# Altium PCB УШЯИ.467444.130_R1.PcbDoc (part 2 of 4)
Units mm, origin at the board's own origin, x right, y up, seen from the top; angles counter-clockwise.
Board outline 280 x 190 mm, 6 copper layers (Top, GND, INT1, INT2, +3.3VB, POWER, Bottom), stack 1.422 mm thick; 240 components, 189 nets, 1128 pads, 331 vias.
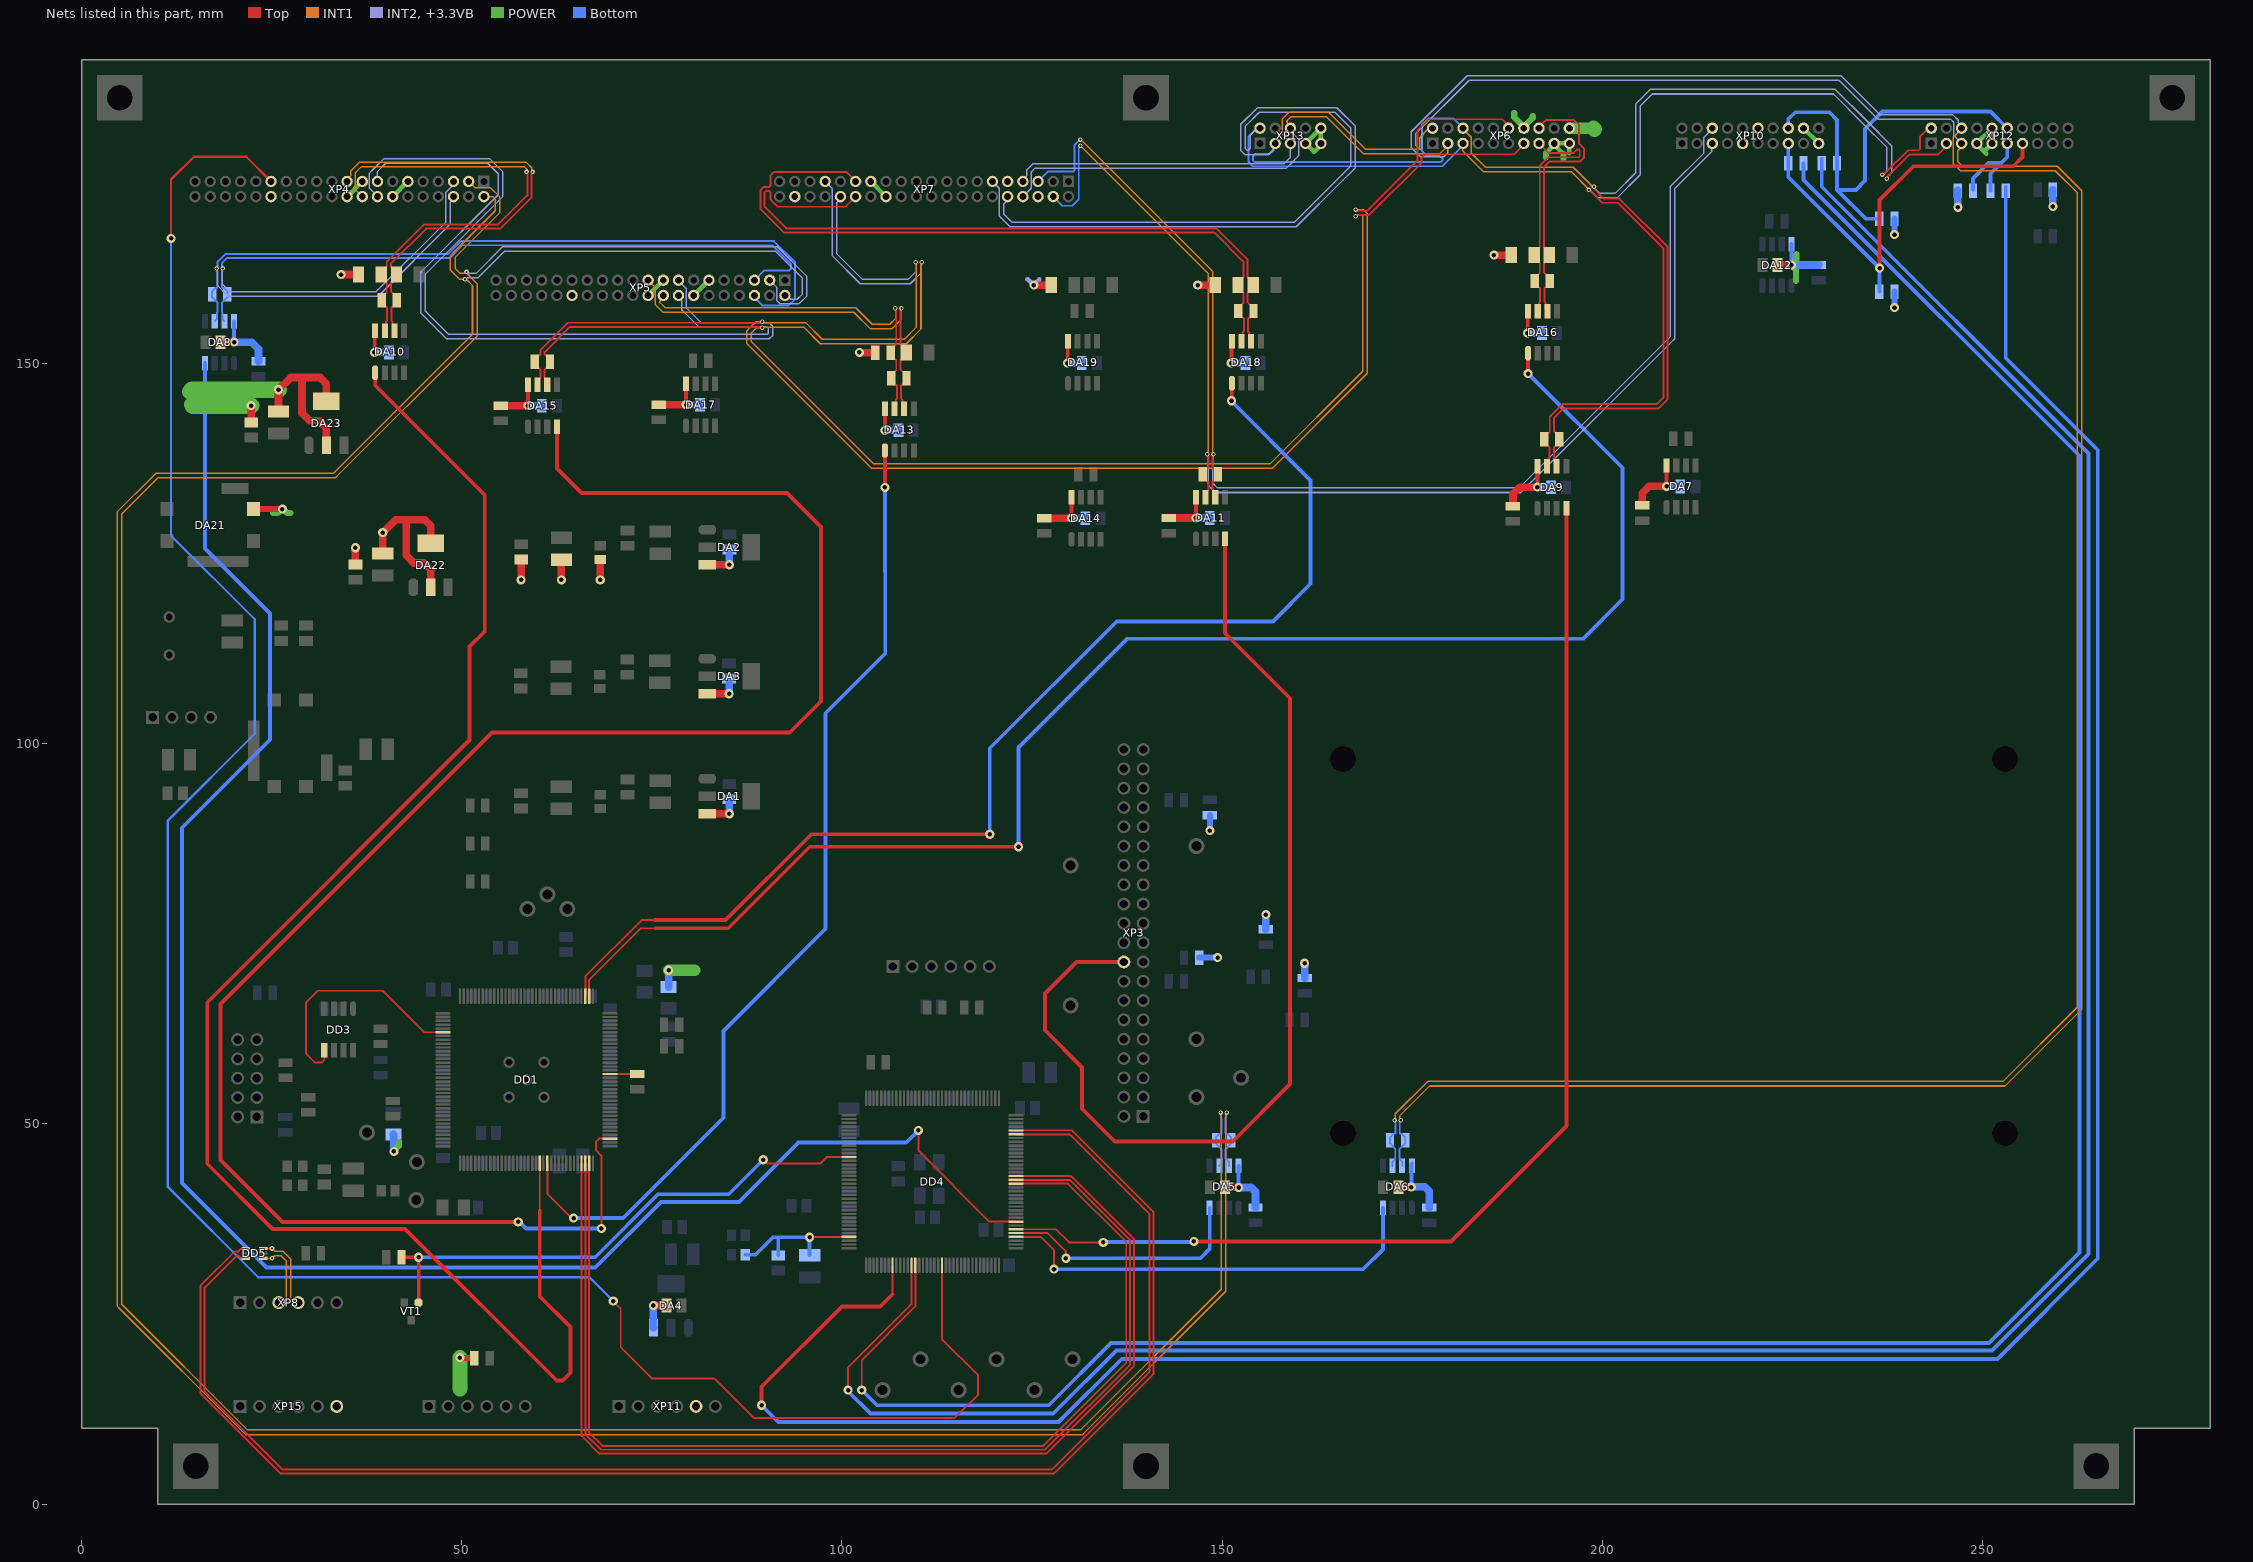
[diagram p6: the nets of this part, all layers, seen from the top]

## Part data
A1: library part Other_15, "8GB Rockchip RK3588, HDMI 2.1, Gigabit LAN port, USB2.0/3.0, microSD card slot, USB Type-C", Manufacturer="Orange Pi", Component Name="Одноплатный компьютер Orange Pi 5 Plus 8GB", Device="Orange Pi 5 Plus", Height=29mm, ID=Other_15, Other information="Идет с покупным устройством: твердотельный накопитель Kingspec SSD NE-128 2280", Weight, kg=0,115, Крепёж="Винт В2.М3-6gx8.36.016 ГОСТ 17473-80 (4шт.), гайка М3-7Н.04.016 ГОСТ 5927-70 (4шт.), Шайба 3.65Г.016 ГОСТ 6402-70 (8шт.),  Шайба 3.04.013 ГОСТ 11371-78 (8шт.), Стойка PCHSN-10 (Ni) Connfly electronic (ChipDip 9000221060)(4шт.)"
C1 C3 C6 C7 C8 C9 C10 C12 C14 C15 C17 C18 C19 C20 C21 C22 C23 C24 C25 C27 C29 C31 C32 C33 C34 C35 C36 C37 C38 C39 C41 C42 C43 C44 C45 C46 C47 C48 C49 C50 C51 C52 C53 C54 C55 C56 C57 C58 C63 C65 C68 C69 C70 C71 C72 C73 C74 C75 C76 C77 C78 C79 C80 C81 C82 C84 C87 C90 C94: library part Cap_60, "Неполярный конденсатор", Case / Package="0805 [2012 Metric]", Manufacturer=Murata, Tolerance=±10%, Voltage=50V, Capacitance="0,1 µF", Component Name="Конденсатор GRM21BR71H104KA01L", Datasheet=https://www.murata.com/en-eu/products/productdetail?partno=GRM21BR71H104KA01%23, Height=1.4mm, ID=Cap_60, Weight, kg=0,000006
  C27 C29: ClassName=Class_VCINT
  C39: ClassName=Class_VCCIO
  C69: ClassName=DA8
  C70: ClassName=DA9
  C71: ClassName=DA7
  C72: ClassName=DA10
  C73: ClassName=DA11
  C74: ClassName=DA12
  C75: ClassName=DA13
  C76: ClassName=DA14
  C77: ClassName=DA15
  C78: ClassName=DA16
  C79: ClassName=DA17
  C80: ClassName=DA18
  C81: ClassName=DA19
C2 C11 C26 C28 C30 C59: library part Cap_14, "Полярный конденсатор", Case / Package="1210 [3528-21 Metric]", Manufacturer="KYOCERA AVX", Tolerance=±10%, Voltage="20V / 10V", Capacitance="4,7 µF", Component Name="Конденсатор TAJB475K020", Datasheet=https://datasheets.kyocera-avx.com/TAJ.pdf, Height=2mm, ID=Cap_14, Weight, kg=0,000016
  C11: ClassName=Class_+2.5V
  C26: ClassName=Class_VCCIO
  C28 C30: ClassName=Class_VCINT
C4 C5: library part Cap_96, "Неполярный конденсатор", Case / Package="0805 [2012 Metric]", Manufacturer=Murata, Tolerance=±10%, Voltage=16V, Capacitance="1 µF", Catalogue="CHIPDIP 8046406206", Component Name="Конденсатор GRM21BR71H105KA01L", Datasheet=https://static.chipdip.ru/lib/223/DOC011223313.pdf, Height=1.4mm, ID=Cap_96, Weight, kg=0,000006
C16 C40 C62 C64 C88 C89 C91 C95: library part Cap_56, "Полярный конденсатор", Case / Package="1210 [3528-21 Metric]", Manufacturer="KYOCERA AVX", Tolerance=±20%, Voltage="20V / 10V", Capacitance="10 µF", Component Name="Конденсатор TAJB106M020", Datasheet=https://datasheets.kyocera-avx.com/TAJ.pdf, Height=2mm, ID=Cap_56, Weight, kg=0,000016
  C16: ClassName=Class_+2.5V
  C40: ClassName=Class_VCCIO
C60 C61: library part Cap_69, "Неполярный конденсатор", Case / Package="0805 [2012 Metric]", Manufacturer=Murata, Tolerance=±5%, Voltage=50V, Capacitance="20 pF", Component Name="Конденсатор GRM2165C1H200J", Datasheet=chrome-extension://efaidnbmnnnibpcajpcglclefindmkaj/https://static.chipdip.ru/lib/235/DOC000235066.pdf, Height=1.4mm, ID=Cap_69, Weight, kg=0,000006
C66 C67: library part Cap_16, "Полярный конденсатор", Case / Package="1206 [3216-18 Metric]", Manufacturer=AVX, Tolerance=±20%, Voltage="16V / 10V", Capacitance="2,2 µF", Component Name="Конденсатор TAJA225M016", Datasheet=https://datasheets.kyocera-avx.com/TAJ.pdf, Height=1.7mm, ID=Cap_16, Weight, kg=0,000016
C86: library part Cap_70, "Полярный конденсатор", Manufacturer=Hitano, Tolerance="± 20%", Voltage=16V, Capacitance="1000 µF", Component Name="Конденсатор EXR102M16B", Datasheet=chrome-extension://efaidnbmnnnibpcajpcglclefindmkaj/https://static.chipdip.ru/lib/934/DOC044934708.pdf, Height=21mm, ID=Cap_70, Weight, kg=0,003
C92 C97: library part Cap_60, "Неполярный конденсатор", Capacitance="0,1 µF", Case / Package="0805 [2012 Metric]", Manufacturer=Murata, Tolerance=±10%, Voltage=50V, Component Name="Конденсатор GRM21BR71H104KA01L", Datasheet=https://www.murata.com/en-eu/products/productdetail?partno=GRM21BR71H104KA01%23, Height=1.4mm, ID=Cap_60, Weight, kg=0,000006
C93 C96: library part Cap_56, "Полярный конденсатор", Capacitance="10 µF", Case / Package="1210 [3528-21 Metric]", Manufacturer="KYOCERA AVX", Tolerance=±20%, Voltage="20V / 10V", Component Name="Конденсатор TAJB106M020", Datasheet=https://datasheets.kyocera-avx.com/TAJ.pdf, Height=2mm, ID=Cap_56, Weight, kg=0,000016
DA1 DA4 DA22 DA23: library part IC_1, "IC, Fixed LDO Voltage Regulator, 5.3V to 10V, 1.15V Dropout, 3.3Vout, 1Aout", Case / Package=SOT-223, Manufacturer=STMicroelectronics, Catalogue="DIGI-KEY 497-1228-2-ND", Component Name="Микросхема LD1117AS33TR", Datasheet=https://www.st.com/content/ccc/resource/technical/document/datasheet/a5/c3/3f/c9/2b/15/40/49/CD00002116.pdf/files/CD00002116.pdf/jcr:content/translations/en.CD00002116.pdf, Device=LD1117AS33TR, Height=1.9mm, ID=IC_1, Weight, kg=0,0045
  DA1: ClassName=Class_VCCIO
DA2: library part IC_8, "IC, Linear Voltage Regulator, 1 Output, 1V Dropout, 2.5Vout, 1Aout", Case / Package=SOT-223, Manufacturer=STMicroelectronics, Catalogue="DIGI-KEY 497-1227-1-ND", ClassName=Class_+2.5V, Component Name="Микросхема LD1117AS25TR", Datasheet=https://www.st.com/content/ccc/resource/technical/document/datasheet/a5/c3/3f/c9/2b/15/40/49/CD00002116.pdf/files/CD00002116.pdf/jcr:content/translations/en.CD00002116.pdf, Device=LD1117AS25TR, Height=1.9mm, ID=IC_8, Weight, kg=0,0045
DA3: library part IC_9, "IC, Fixed LDO Voltage Regulator, 1 Output, 1V Dropout, 1.2Vout, 1Aout", Case / Package=SOT-223, Manufacturer=STMicroelectronics, Catalogue="DIGI-KEY 497-6445-1-ND", ClassName=Class_VCINT, Component Name="Микросхема LD1117AS12TR", Datasheet=https://www.st.com/content/ccc/resource/technical/document/datasheet/a5/c3/3f/c9/2b/15/40/49/CD00002116.pdf/files/CD00002116.pdf/jcr:content/translations/en.CD00002116.pdf, Device=LD1117AS12TR, Height=1.9mm, ID=IC_9, Weight, kg=0,0045
DA5 DA6 DA7 DA8 DA9 DA11 DA12 DA14 DA17: library part IC_11, "IC, Transceiver, RS422/RS485, 1 Driver, 1 Receiver, 4.75 V to 5.25 V, -40°C to 125°C", Case / Package=SOIC-8, Manufacturer="Analog Devices", Component Name="Микросхема ADM483AR", Datasheet=https://www.analog.com/media/en/technical-documentation/data-sheets/ADM383.pdf, Device=ADM483AR, Height=1.75mm, ID=IC_11, Weight, kg=0,0002
  DA7: ClassName=DA7
  DA8: ClassName=DA8
  DA9: ClassName=DA9
  DA11: ClassName=DA11
  DA12: ClassName=DA12
  DA14: ClassName=DA14
  DA17: ClassName=DA17
DA10 DA13 DA15 DA16 DA18 DA19: library part IC_57, "IC, RS422 / RS485 Transceiver IC, 1 Driver, 1 Receiver, 3 V to 3.6 V, -40°C to 125°C, SOIC-8", Case / Package=SOIC-8, Manufacturer="Texas Instruments", Catalogue="ChipDip 8002953832", Component Name="Микросхема SN65HVD75D", Datasheet=https://static.chipdip.ru/lib/276/DOC012276983.pdf, Device=SN65HVD75D, Height=1.75mm, ID=IC_57, Weight, kg=0,002
  DA10: ClassName=DA10
  DA13: ClassName=DA13
  DA15: ClassName=DA15
  DA16: ClassName=DA16
  DA18: ClassName=DA18
  DA19: ClassName=DA19
DA20 DA21: library part Filt_2, "16В, 35дБ", Current=20А, Manufacturer="Murata Electronics", Component Name="Фильтр BNX028-01", Datasheet=https://static.chipdip.ru/lib/614/DOC034614186.pdf, Device=BNX028-01, Height=3.7mm, ID=Filt_2, Weight, kg=0,001
DD1: library part IC_13, "IC, Cyclone III, Field Programmable Gate Array (FPGA), 	1.15V to 1.25V, 315 MHz, 94 I/O", Case / Package="144-EQFP (20x20)", Manufacturer=Intel, Catalogue="DIGI-KEY EP3C5E144I7-ND", Component Name="Микросхема EP3C5E144I7", Datasheet=https://www.intel.com/content/dam/support/us/en/programmable/support-resources/bulk-container/pdfs/literature/hb/cfg/cyc-c51014.pdf, Device=EP3C5E144I7, Height=1.6mm, ID=IC_13, Weight, kg=0,012
DD2: library part Other_16, "Crystals, Oscillators, 20 MHz", Manufacturer="Jauch Quartz GmbH", Component Name="Кварцевый генератор O 20,0-JO32-B-3.3-1-T1-LF", Datasheet=https://static.chipdip.ru/lib/464/DOC049464856.pdf, Device="O 20,0-JO32-B-3.3-1-T1-LF", Height=1.15mm, ID=Other_16, Weight, kg=0,001
DD3: library part IC_12, "IC, FPGA Configuration Memory, Flash, 4 Mbit, 40 MHz, JTAG, Serial", Case / Package=SOIC-8, Manufacturer=Intel, Catalogue="FARNELL 1662262", Component Name="Микросхема EPCS4SI8N", Datasheet=https://www.intel.com/content/dam/support/us/en/programmable/support-resources/bulk-container/pdfs/literature/hb/cfg/cyc-c51014.pdf, Device=EPCS4SI8N, Height=1.75mm, ID=IC_12, Weight, kg=0,0002
DD4: library part IC_15, "IC, ARM Cortex-M4, 168 MHz, 1 MB ROM, 192 kB RAM, -40°C to 85°C", Case / Package="144-QFP (20x20)", Manufacturer=STMicroelectronics, Component Name="Микросхема STM32F407ZGTx", Datasheet=https://www.st.com/resource/en/datasheet/dm00037051.pdf, Device=STM32F429VIT6STM32F407ZGTx, Height=1.6mm, ID=IC_15, Weight, kg=0,0011
DD5: library part IC_5, "EMI Filter, 2-Channel, USB Upstream Terminator, ESD Protection", Case / Package=SOT-323-6, Manufacturer=STMicroelectronics, Catalogue="FARNELL 2341662", Component Name="Микросхема USBUF01W6", Datasheet=https://www.farnell.com/datasheets/1964274.pdf, Device=USBUF01W6, Height=1.1mm, ID=IC_5, Weight, kg=0,000006
L1 L3 L4 L5: library part Ind_4, Manufacturer=Murata, Resistance="0.1 ohm", Tolerance=±20%, Component Name="Дроссель LQH31CNR22M03", Datasheet=https://www.murata.com/products/productdetail?partno=LQH31CNR22M03%23, Height=2mm, ID=Ind_4, Inductance="0,22 μH", Isat=850mA, Weight, kg=0,00003
L2 L6 L7 L8 L9 L10: library part Ind_5, Case / Package="0805 [2012 Metric]", Manufacturer=Vishay, Resistance="300 mOhm", Tolerance=±25%, Catalogue="DIGI-KEY 541-2297-1-ND", Component Name="Фильтр ферритовый ILBB0805ER601V", Datasheet=https://www.vishay.com/docs/34025/ilbb0805.pdf, Height=1.1mm, ID=Ind_5, Isat=200mA, Weight, kg=0,00006
  L2: ClassName=Class_VCCIO
  L6: ClassName=Class_+2.5V
  L7: ClassName=Class_VCINT
R2: library part Res_12, Case / Package="0805 [2012 Metric]", Tolerance=±5%, Component Name="Резистор 0805-51 Ом ±5%", Height=0.7mm, ID=Res_12, Resistance=51R, Weight, kg=0,000006
R3 R5 R7 R53 R54 R64 R65 R66 R67 R68 R69 R70 R71 R72 R73: library part Res_11, Case / Package="0805 [2012 Metric]", Tolerance=±5%, Component Name="Резистор 0805-1 кОм ±5%", Height=0.7mm, ID=Res_11, Resistance=1k, Weight, kg=0,000006
R4 R6 R8 R9 R10 R11 R12 R13 R14 R15 R17 R19 R20 R21 R28 R29 R35 R36 R42 R61: library part Res_5, Case / Package="0805 [2012 Metric]", Tolerance=±5%, Component Name="Резистор 0805-10 кОм ±5%", Height=0.7mm, ID=Res_5, Resistance=10k, Weight, kg=0,000006
  R19: ClassName=DA7
  R20: ClassName=DA8
  R21: ClassName=DA9
  R28: ClassName=DA11
  R29: ClassName=DA12
  R35: ClassName=DA14
  R36: ClassName=DA15
  R42: ClassName=DA17
R16 R18 R22 R23 R24 R26 R30 R31 R32 R33 R38 R39 R40 R44 R45 R47: library part Res_10, Case / Package="0805 [2012 Metric]", Tolerance=±5%, Component Name="Резистор 0805-100 Ом ±5%", Height=0.7mm, ID=Res_10, Resistance=100R, Weight, kg=0,000006
  R22: ClassName=DA8
  R23: ClassName=DA9
  R24: ClassName=DA7
  R26: ClassName=DA10
  R30 R31: ClassName=DA13
  R32: ClassName=DA11
  R33: ClassName=DA12
  R38: ClassName=DA16
  R39: ClassName=DA14
  R40: ClassName=DA15
  R44: ClassName=DA18
  R45: ClassName=DA17
  R47: ClassName=DA19
R25 R27 R34 R37 R41 R43 R46 R48 R49: library part Res_50, Case / Package="1206 [3216 Metric]", Tolerance=±5%, Component Name="Резистор 1206-1 кОм ±5%", Height=0.7mm, ID=Res_50, Resistance=1k, Weight, kg=0,0000162
  R25 R27: ClassName=DA10
  R34: ClassName=DA13
  R37 R41: ClassName=DA16
  R43 R48: ClassName=DA18
  R46 R49: ClassName=DA19
R50: library part Res_89, Case / Package="0805 [2012 Metric]", Tolerance=±5%, Component Name="Резистор 0805-30 Ом ±5%", Height=0.7mm, ID=Res_89, Resistance=30R, Weight, kg=0,000006
R51 R52 R55 R56: library part Res_163, Case / Package="0805 [2012 Metric]", Tolerance=±5%, Component Name="Резистор 0805-5,1 кОм ±5%", Height=0.7mm, ID=Res_163, Resistance=5,1k, Weight, kg=0,000006
R57: library part Res_57, Case / Package="0805 [2012 Metric]", Tolerance=±1%, Component Name="Резистор 0805-10 кОм ±1%", Height=0.7mm, ID=Res_57, Resistance=10k, Weight, kg=0,000006
R58 R59: library part Res_11, Case / Package="0805 [2012 Metric]", Resistance=1k, Tolerance=±5%, Component Name="Резистор 0805-1 кОм ±5%", Height=0.7mm, ID=Res_11, Weight, kg=0,000006
R60: library part Res_165, Case / Package="0805 [2012 Metric]", Tolerance=±5%, Component Name="Резистор 0805-150 Ом ±5%", Height=0.7mm, ID=Res_165, Resistance=150R, Weight, kg=0,000006
R62 R63: library part Res_164, Case / Package="0805 [2012 Metric]", Tolerance=±5%, Component Name="Резистор 0805-3,6 кОм ±5%", Height=0.7mm, ID=Res_164, Resistance=3,6k, Weight, kg=0,000006
TP1 TP2 TP3 TP4 TP5 TP6 TP7 TP8 TP9 TP10 TP11 TP12 TP13 TP14 TP15 TP16 TP17 TP18: library part Pad_13, Component Name=TP_DSP_1.3, ID=Pad_13
VT1: library part Trans_1, "Транзистор n-канальный, изолированный затвор", Manufacturer=Onsemi, Catalogue="DIGI-KEY NDS7002ATR-ND", Component Name="Транзистор NDS7002A", Datasheet=https://www.onsemi.com/pdf/datasheet/nds7002a-d.pdf, Device=NDS7002A, Height=1.11mm, ID=Trans_1, Weight, kg=0,000008
XP1: library part Conn_7, "Male, 10 pins, 2 rows, Vertical", Manufacturer="Connfly electronic", Component Name="Вилка PLD-10", Datasheet=https://static.chipdip.ru/lib/977/DOC005977245.pdf, Device=PLD-10, Height=10.8mm, ID=Conn_7, Weight, kg=0,00052, Крепёж="Не нужно"
XP2 XP8 XP11 XP14 XP15: library part Conn_2, "Male, 6 pin, 1 row, Vertical, Board-to-Board, 2.54 mm", Manufacturer="TE Connectivity", Catalogue="TE Internal 280372-2", Component Name="Вилка AMPMODU II 280372-2", Datasheet=https://www.te.com/usa-en/product-280372-2.datasheet.pdf, Device="AMPMODU II 280372-2", Height=12.8mm, ID=Conn_2, Weight, kg=0,0013, Крепёж="Не нужно"
XP3: library part Conn_30, "Male, 40 pins, 2 rows, Vertical, DS1013-40S, 2.54 mm", Manufacturer="Connfly electronic", Catalogue="ChipDip 57941", Component Name="Вилка BH-40", Datasheet=https://static.chipdip.ru/lib/525/DOC059525716.pdf, Device=BH-40, Height=9.1mm, ID=Conn_30, Weight, kg=0,0045, Крепёж="Не нужно"
XP4 XP5 XP7: library part Conn_29, "Male, 40 pins, 2 rows, Vertical, DS1014-40, 2 mm", Manufacturer="Connfly electronic", Catalogue="ChipDip 9000019617", Component Name="Вилка BH2-40", Datasheet=https://static.chipdip.ru/lib/525/DOC059525726.pdf, Device=BH2-40, Height=5.8mm, ID=Conn_29, Weight, kg=0,0014, Крепёж="Не нужно"
XP6 XP10 XP12: library part Conn_31, "Male, 20 pins, 2 rows, Right Angle, DS1014-20RF1B-B, 2 mm", Manufacturer="Connfly electronic", Catalogue="ChipDip 8027300167", Component Name="Вилка BH2-20R", Datasheet=https://static.chipdip.ru/lib/525/DOC059525726.pdf, Device=BH2-20R, Height=5.6mm, ID=Conn_31, Weight, kg=0,0016, Крепёж="Не нужно"
XP9: library part Conn_3, "Male, 4 pin, 1 row, Vertical, Board-to-Board, 2.54 mm", Manufacturer="TE Connectivity", Catalogue="TE Internal 280371-2", Component Name="Вилка AMPMODU II 280371-2", Datasheet=https://www.te.com/usa-en/product-280371-2.datasheet.pdf, Device="AMPMODU II 280371-2", Height=12.8mm, ID=Conn_3, Weight, kg=0,001, Крепёж="Не нужно"
XP13: library part Conn_32, "Male, 10 pins, 2 rows, Vertical, DS1014-10RF1B-B, 2 mm", Manufacturer="Connfly electronic", Catalogue="ChipDip 8144058573", Component Name="Вилка BH2-10R", Datasheet=https://static.chipdip.ru/lib/525/DOC059525726.pdf, Device=BH2-10R, Height=5.6mm, ID=Conn_32, Weight, kg=0,00071, Крепёж="Не нужно"
ZQ1: library part Rez_1, Frequency=25MHz, Manufacturer="Jauch Quartz GmbH", Component Name="Резонатор Q 25.0JXS63-12-30/30-FU", Datasheet=https://www.jauch.com/downloadfile/57fdedace792c_938dbcb9dba48037cc0e/jxs63-200613.pdf, Device="Q 25.0JXS63-12-30/30-FU", Height=1mm, ID=Rez_1, Weight, kg=0,001

## Free pads (board coordinates)
  rect 6x6 hole 3.4: 0(5,185) 0(15,5) 0(140,5) 0(140,185) 0(265,5) 0(275,185)

## Via types
v1: diameter 1.2, hole 0.6, Top to Bottom, tented both sides, 289 vias
v2: diameter 0.6, hole 0.3, Top to Bottom, tented both sides, 42 vias

## Nets (pads, with @x,y where several pads share a name; then routed paths per layer and width w, separated by ;. In a path a pad name is that pad's centre, name@x,y a point inside that pad or via, vN(x,y) a via of type N, cw(c..) or ccw(c..) an arc to the next point about the centre after c; other vN are vias at no path point)
3/50V: DD4.57 XP4.29 | length 299.9
  Top w0.25: v1@69.925,26.65 70.907,25.668 70.907,20.618 75.025,16.5 83.25,16.5 88.425,11.325 114.825,11.325 117.9,14.4 117.9,16.975 113.162,21.713 DD4.57@113.162,31.412
  Top w0.3: v1(11.75,166.5) 11.75,174.25 14.75,177.25 21.65,177.25 XP4.29@24.9,174
  Bottom w0.3: v1(11.75,166.5) 11.75,127.396 22.75,116.396 22.75,101.35 11.325,89.925 11.325,41.725 23.225,29.825 66.789,29.825 v1(69.914,26.7)
50E+: R62.2 R65.1 XP10.15 XP12.13 | length 56.4
  Top w0.5: v1(236.5,162.6) 236.5,171.55 240.95,176 254.1,176 255.3,177.2 XP12.13@255.3,179
  Bottom w0.5: XP10.15@224.5,179 R65.1@224.5,176.4 224.5,174.6 v1(236.5,162.6) 236.485,162.585 236.485,159.514 R62.2@236.471,159.5
50E+R: DD4.50 R65.2 | length 347
  Top w0.25: v1(102.6,15) 102.6,18.95 109.662,26.012 DD4.50@109.662,31.412
  Bottom w0.5: v1(102.6,15) 104.6,13 127.2,13 135.4,21.2 250.9,21.2 262.8,33.1 262.8,137.9 226.5,174.2 R65.2@226.5,176.4
50E-: R63.2 R66.1 XP10.16 XP12.12 | length 56.2
  Bottom w0.5: XP10.16@224.5,181 224.5,182.195 225.405,183.1 229.9,183.1 230.9,182.1 R66.1@230.9,176.4 ; R66.1@230.9,176.376 230.9,172.883 234.683,169.1 R63.2@236.471,169.1 ; 231.034,172.883 233.383,172.883 234.6,174.1 234.6,180.926 236.874,183.2 251.1,183.2 XP12.12@253.3,181
50E-R: DD4.49 R66.2 | length 351.7
  Top w0.25: v1(100.813,15) 100.813,18.001 109.162,26.351 DD4.49@109.162,31.412
  Bottom w0.5: v1(100.813,15) 100.813,14.837 103.75,11.9 127.8,11.9 136.1,20.2 251.314,20.2 264,32.886 264,138.2 228.9,173.3 R66.2@228.9,176.965
3000VE: R57.2 R64.1 XP12.11 | length 13.2
  Bottom w0.5: R57.2@248.8,172.9 248.8,174.4 250.85,176.45 252.55,176.45 ; R64.1@251.1,172.8 251.1,175 252.55,176.45 ; XP12.11@253.3,179 253.3,177.2 252.55,176.45
3000VER: DD4.44 R64.2 | length 360.3
  Top w0.25: v1@89.425,12.85 v1(89.425,13) ; 106.662,27.612 DD4.44@106.662,31.412
  Top w0.5: v1(89.425,13) 89.425,15.425 100,26 105.05,26 106.662,27.612
  Bottom w0.5: v1(89.425,13) 91.625,10.8 128.5,10.8 136.8,19.1 252,19.1 265.2,32.3 265.2,138.65 253.1,150.75 R64.2@253.1,173.302
+2.5V: C15.2 C16.+ L1.1 L3.1 L6.2 | length 17.4
  Top w1: v1(57.8,121.575) C15.2@57.8,124.275 ; v1(63.1,121.575) C16.+@63.1,124.225 ; v1(68.2,121.575) L6.2@68.2,124.275
  POWER w0.8: v1(41.05,46.405) 41.05,46.46 41.72,47.129 41.72,47.605
  POWER w1.5: v1(77.2,70.225) 80.625,70.225
  Bottom w1: L1.1@41,48.625 41.025,48.6 41.025,46.43 v1(41.05,46.405) ; L3.1@77.2,68.025 v1(77.2,70.225)
+3.3VB: C72.2 C75.2 C77.2 C78.2 C80.2 C81.2 C92.2 C93.+ DA10.8 DA13.8 DA15.8 DA16.8 DA18.8 DA19.8 DA22.2 DA22.4 R25.1 R30.1 R36.1 R37.1 R43.1 R46.1 R51.1 R52.1 R55.1 R56.1 R57.1 R62.1 R63.1 R67.1 XP11.5 | length 87.7
  Top w0.5: v1(38.5,151.5) 38.547,151.547 38.547,154.302 DA10.8@38.595,154.35 ; v1(58.695,144.5) DA15.8@58.695,147.25 ; v1(105.645,141.247) DA13.8@105.645,144.097 ; v1(129.65,150.1) 129.697,150.147 129.697,152.902 DA19.8@129.745,152.95 ; v1(151.2,150.1) 151.247,150.147 151.247,152.902 DA18.8@151.295,152.95 ; v1(190.175,154.05) 190.223,154.097 190.223,156.853 DA16.8@190.27,156.9
  Top w1: v1(34.1,161.75) R25.1@36.4,161.75 ; C92.2@36,123.6 v1(36,125.8) ; C93.+@39.6,125.05 v1(39.6,127.8) ; v1@39.638,127.838 41.3,129.5 42.7,129.5 ; DA22.2@45.8,120.7 DA22.2@45.9,120.6 ; DA22.2@45.9,121.3 45.9,122.9 45,123.8 43.7,123.8 42.7,124.8 42.7,129.5 ; DA22.4@45.9,126.4 45.9,128.7 45.1,129.5 42.7,129.5 ; R36.1@55.1,144.5 v1(58.695,144.5) ; v1(102.3,151.497) 102.326,151.471 104.374,151.471 R30.1@104.4,151.445 ; v1(125.25,160.35) R46.1@127.55,160.35 ; v1(146.8,160.35) R43.1@149.1,160.35 ; v1(185.775,164.3) R37.1@188.075,164.3
  POWER w0.8: v1@35.925,125.8 v1(36,125.8) v1@36.108,125.8
  INT2, +3.3VB w0.6: 124.4,161.15 124.45,161.15 v1(125.25,160.35) 125.945,161.045 125.945,161.119
  Bottom w0.8: R55.1@147,71.883 v1(149.425,71.883) ; v1(148.4,88.588) R56.1@148.4,90.638 ; v1(238.471,157.4) R62.1@238.471,159.5 ; v1(238.471,167) R63.1@238.471,169.1
  Bottom w1: v1(38.5,151.5) C72.2@40.4,151.5 ; v1(58.695,144.5) C77.2@60.505,144.5 ; v1@105.55,141.247 v1(105.645,141.247) C75.2@107.45,141.247 ; v1(129.65,150.1) C81.2@131.55,150.1 ; v1(151.2,150.1) C80.2@153.1,150.1 ; R52.1@155.775,75.6 v1(155.775,77.55) ; R51.1@160.875,69.2 v1(160.875,71.15) ; v1(190.175,154.05) C78.2@192.075,154.05 ; v1(246.8,170.6) R57.1@246.8,172.8 ; v1(259.3,170.7) R67.1@259.3,172.9
+3.3VC: C96.+ C97.2 DA23.2 DA23.4 XP4.11 XP4.14 XP4.17 XP4.20 XP4.30 XP5.11 XP5.14 XP5.17 XP5.20 XP5.30 XP6.20 XP7.6 XP7.9 XP7.26 XP7.27 XP7.38 XP10.9 XP10.12 XP10.18 XP10.19 XP12.7 XP12.9 XP12.10 XP13.7 XP13.9 XP13.10 | length 81.2
  Top w1: C97.2@22.275,142.3 v1(22.275,144.5) ; C96.+@25.875,143.75 v1(25.875,146.6) 27.475,148.2 28.975,148.2 ; DA23.2@32.075,139.4 DA23.2@32.175,139.3 ; DA23.2@32.175,140 32.175,141.6 31.275,142.5 29.975,142.5 28.975,143.5 28.975,148.2 ; DA23.4@32.175,145.1 32.175,147.4 31.375,148.2 28.975,148.2
  POWER w0.6: XP4.20@34.9,172 XP4.17@36.9,174 ; XP4.14@40.9,172 XP4.11@42.9,174 ; XP5.20@74.5,159 XP5.17@76.5,161 ; XP5.14@80.5,159 XP5.11@82.5,161 ; XP7.27@103.8,174 XP7.26@105.8,172 ; 162.15,177.875 162.15,177.906 ; XP10.18@226.5,181 XP10.19@228.5,179 ; 250.55,177.65 250.212,177.988 ; 162.15,177.906 162.094,177.906 XP13.7@161,179 XP13.10@163,181 XP13.9@163,179 163,178.756 162.15,177.906 ; 250.212,177.988 249.3,178.9 XP12.7@249.3,179 XP12.10@251.3,181 XP12.9@251.3,179 250.287,177.988 250.212,177.988
  POWER w1.5: XP6.20@195.7,181 198.875,181
  POWER w2: 14.175,146.325 14.45,146.6 ; 14.45,144.65 14.6,144.5 ; 198.875,181 199,180.875
  POWER w2.2: 14.45,146.6 v1(25.875,146.6) ; 14.6,144.5 v1(22.275,144.5)
+5V: C3.2 C12.2 C14.2 C58.1 C65.2 C68.2 C69.2 C70.2 C71.2 C73.2 C74.2 C76.2 C79.2 DA1.3 DA2.3 DA3.3 DA4.3 DA5.8 DA6.8 DA7.8 DA8.8 DA9.8 DA11.8 DA12.8 DA14.8 DA17.8 DA21.2 R15.1 R17.1 R19.1 R20.1 R21.1 R28.1 R29.1 R35.1 R42.1 R60.2 XP6.14 XP6.17 XP6.19 XP15.6 | length 128.3
  Top w0.5: v1(79.495,144.634) DA17.8@79.495,147.384 ; v1(130.195,129.7) DA14.8@130.195,132.45 ; v1(146.57,129.725) DA11.8@146.57,132.475 ; v1(191.489,133.775) DA9.8@191.489,136.525 ; v1(208.489,133.875) DA7.8@208.489,136.625
  Top w0.8: DA21.2@22.603,130.9 v1(26.4,130.9) ; v1(49.75,19.275) 49.788,19.238 51.612,19.238 R60.2@51.65,19.2 ; C65.2@150.4,41.7 C65.2@150.425,41.675 ; v1@152.16,41.675 v1(152.185,41.65)
  Top w1: C69.2@18.25,152.85 v1(20.036,152.85) ; v1(75.2,26.125) C58.1@76.9,26.125 C58.1@76.925,26.125 ; R42.1@75.9,144.634 v1(79.495,144.634) ; DA3.3@82.25,106.6 v1(85.15,106.6) ; DA1.3@82.29,90.816 v1(85.19,90.816) ; DA2.3@82.3,123.575 v1(85.2,123.575) ; R35.1@126.6,129.7 v1(130.195,129.7) ; R28.1@142.975,129.725 v1(146.57,129.725) ; C65.2@150.425,41.675 v1@152.16,41.675 ; C68.2@173.2,42.1 173.2,41.85 173.35,41.7 v1(174.9,41.7) ; R21.1@188.275,131.275 188.275,132.875 189.175,133.775 v1(191.489,133.775) ; R19.1@205.275,131.375 205.275,132.975 206.175,133.875 v1(208.489,133.875) ; C74.2@223.095,163 v1(224.905,163)
  POWER w0.6: 192.596,177.707 193.7,178.811 194.909,177.602 ; XP6.17@193.7,179.244 XP6.17@193.7,179 XP6.19@195.7,179 ; 195.7,177.7 XP6.19@195.7,179 ; XP6.19@195.7,179.244 XP6.19@195.7,179
  POWER w0.8: 25.19,130.375 25.767,130.375 26.292,130.9 v1(26.4,130.9) 26.508,130.9 27.033,130.375 27.484,130.375 ; 188.449,183.024 188.449,182.441 XP6.14@189.7,181.189 ; XP6.14@189.7,181 XP6.14@189.7,181.189 ; 190.875,182.586 190.875,182.364 XP6.14@189.7,181.189 ; 192.596,177.163 192.596,177.707 ; XP6.17@193.7,178.811 XP6.17@193.7,179 ; 194.909,176.929 194.909,177.602 ; v1@224.905,162.946 224.905,162.937 225.51,162.331 225.51,160.904 ; v1@224.905,163.054 225.6,163.749 225.6,164.474
  POWER w1: v1@224.905,162.946 v1(224.905,163) v1@224.905,163.054
  POWER w2: 49.75,15.175 v1(49.75,19.275)
  Bottom w0.5: v1(20.036,152.85) DA8.8@20.036,155.6 ; v1(152.185,41.65) DA5.8@152.185,44.492 ; v1@174.975,41.775 174.937,41.812 174.937,44.755 DA6.8@174.975,44.792 ; v1(224.905,163) DA12.8@224.905,165.75
  Bottom w1: v1(20.036,152.85) 22.35,152.85 23.25,151.95 R20.1@23.25,150.35 ; v1(75.2,26.125) 75.203,26.122 75.203,23.203 DA4.3@75.206,23.2 ; v1(79.495,144.634) C79.2@81.305,144.634 ; v1(85.15,106.6) 85.15,107.9 ; v1(85.19,90.816) C14.2@85.19,92.716 ; v1(85.2,123.575) 85.2,124.875 ; v1(130.195,129.7) C76.2@132.005,129.7 ; v1(146.57,129.725) C73.2@148.38,129.725 ; v1(152.185,41.65) 153.819,41.65 154.405,41.064 R15.1@154.405,39.017 ; v1@174.975,41.775 v1(174.9,41.7) 174.954,41.7 175.007,41.753 176.689,41.753 177.275,41.167 R17.1@177.275,39.017 ; v1(191.489,133.775) C70.2@193.275,133.775 ; v1(208.489,133.875) C71.2@210.275,133.875 ; v1(224.905,163) R29.1@228.5,163
A0_RG: DD1.71 DD4.90 | length 144.9
  Top w0.25: DD1.71@66.75,44.837 66.75,41.579 66.75,9.414 68.514,7.65 126.486,7.65 137.4,18.564 137.4,34.482 129.732,42.15 DD4.90@122.9,42.15
A1_RG: DD1.70 DD4.91 | length 147.5
  Top w0.25: 66.25,41.549 DD1.70@66.25,44.837 ; 66.25,41.654 66.25,9.207 68.307,7.15 126.693,7.15 137.9,18.357 137.9,34.689 129.939,42.65 DD4.91@122.9,42.65
ASDO: DD1.6 DD3.5 | length 31.6
  Top w0.25: DD3.5@31.895,59.375 31.895,58.42 31.56,58.085 30.68,58.085 29.5,59.265 29.5,66.003 31.022,67.525 39.6,67.525 45.05,62.075 DD1.6@47.512,62.075
AVCST: C63.2 C64.+ DD4.33 L9.2 | length 19.4
  Top w0.25: v1(95.75,35.1) 95.8,35.15 DD4.33@100.924,35.15
  Bottom w0.5: L9.2@87.275,32.8 88.625,32.8 90.925,35.1 91.575,35.1 ; C63.2@91.625,32.725 91.625,35.05 91.575,35.1 ; C64.+@95.75,32.725 v1(95.75,35.1) 91.575,35.1
CLK1_DAC: DA8.4 DD4.80 | length 244.5
  Top w0.25: v1(110.05,49.15) 110.075,49.125 110.075,46.475 119.4,37.15 DD4.80@122.9,37.15
  Bottom w0.5: DA8.4@16.226,150.1 16.226,125.72 24.775,117.171 24.775,100.55 13.2,88.975 13.2,42.225 24.3,31.125 67.55,31.125 76.175,39.75 86.475,39.75 94.275,47.55 108.45,47.55 v1(110.05,49.15)
CLK1_DAC_n: DA8.7 R22.1 XP4.5 XP5.5 | length 133
  Top w0.25: v2@18.483,162.617 v2(18.55,162.55)
  INT2, +3.3VB w0.2: v2(18.55,162.55) 18.45,162.45 18.45,160.55 19.5,159.5 38.75,159.5 47.85,168.6 47.85,172.499 48.651,173.3 48.651,173.751 XP4.5@48.9,174
  Bottom w0.25: DA8.7@18.766,155.6 18.531,155.836 18.531,156.744 18.425,156.85 18.425,158.025 19.15,158.75 R22.1@19.15,159.15 19.15,159.55 18.725,159.975 18.571,159.975 18.425,160.121 18.425,162.05 18.483,162.108 18.483,162.483 v2(18.55,162.55) 18.483,162.617 18.483,162.813 18.425,162.871 18.425,163.225 19.1,163.9 48.378,163.9 50.078,165.6 90.822,165.6 93.28,163.142 93.28,162.48 93.1,162.3 89.8,162.3 XP5.5@88.5,161
CLK1_DAC_p: DA8.6 R22.2 XP4.6 XP5.6 | length 139.6
  Top w0.25: v2(17.75,162.55) v2@17.817,162.617
  INT2, +3.3VB w0.2: v2(17.75,162.55) 17.85,162.45 17.85,160.301 19.076,159.076 19.251,158.9 38.999,158.9 48.45,168.351 48.45,171.233 48.9,171.683 XP4.6@48.9,172
  Bottom w0.25: DA8.6@17.496,155.6 17.763,155.867 17.763,156.713 17.875,156.825 17.875,158.025 17.15,158.75 R22.2@17.15,159.15 17.15,159.55 17.575,159.975 17.729,159.975 17.875,160.121 17.875,162.05 17.817,162.108 17.817,162.483 v2(17.75,162.55) 17.817,162.617 17.817,162.813 17.875,162.871 17.875,163.453 18.872,164.45 48.15,164.45 49.85,166.15 91.05,166.15 93.83,163.37 93.83,161.997 93.83,158.53 93,157.7 89.5,157.7 88.5,158.7 XP5.6@88.5,159
CLK2_DAC: DA9.4 DD4.78 | length 160.8
  Top w0.25: DD4.78@122.9,36.15 128.15,36.15 129.875,34.425 v1(134.375,34.425)
  Top w0.5: v1(146.3,34.55) 180.125,34.55 195.299,49.724 DA9.4@195.299,131.025
  Bottom w0.25: v1(134.375,34.425) v1@134.437,34.488 ; v1@146.238,34.488 v1(146.3,34.55)
  Bottom w0.5: v1@134.437,34.488 v1@146.238,34.488
CLK2_DAC_n: DA9.7 R23.1 XP6.5 XP7.10 XP12.2 XP13.2 | length 257.5
  Top w0.25: DA9.7@192.759,136.525 192.994,136.761 192.994,137.669 193.1,137.775 193.1,138.95 192.375,139.675 R23.1@192.375,140.075 192.375,140.475 192.8,140.9 192.954,140.9 193.108,141.055 193.108,143.056 194.752,144.7 207.2,144.7 208.069,145.569 208.069,165.178 202.048,171.199 200.02,171.199 198.52,172.7 198.345,172.875 v2(198.25,172.875) ; v2(236.874,174.901) 236.969,174.901 237.389,175.321 237.471,175.321 240.25,178.1 241.654,178.1 241.8,178.246 241.8,179.875 242.567,180.642 242.604,180.642 242.962,181 XP12.2@243.3,181
  INT1 w0.2: XP6.5@181.7,179 181.7,177.957 184.4,175.257 195.972,175.257 198.25,172.979 v2(198.25,172.875)
  INT2, +3.3VB w0.2: XP7.10@121.8,172 121.551,171.751 121.551,171.284 121.3,171.033 121.3,169.7 121.8,169.2 122.375,168.625 159.525,168.625 166.95,176.05 166.95,180.997 164.847,183.1 154.9,183.1 153.075,181.275 153.075,178.3 153.275,178.1 153.45,178.1 153.725,178.375 153.725,180.1 154.27,180.645 154.293,180.645 154.648,181 XP13.2@155,181 ; v2(198.25,172.875) 198.358,172.875 198.509,172.724 198.548,172.724 199.447,171.825 201.963,171.825 205.025,174.887 205.025,183.926 206.599,185.5 230.43,185.5 234.276,181.654 237.474,178.456 237.474,175.359 237.169,175.054 237.136,175.054 236.982,174.901 v2(236.874,174.901)
  Bottom w0.25: XP13.2@155,181 154.662,181 154.329,180.667 154.242,180.667 153.5,179.925 153.5,176.572 154.072,176 179,176 181.7,178.7 XP6.5@181.7,179
CLK2_DAC_p: DA9.6 R23.2 XP6.6 XP7.11 XP12.3 XP13.3 | length 276.3
  Top w0.25: DA9.6@194.029,136.525 193.762,136.792 193.762,137.638 193.65,137.75 193.65,138.95 194.375,139.675 R23.2@194.375,140.075 194.375,140.475 193.658,141.192 193.658,142.828 194.98,144.15 207.428,144.15 208.619,145.342 208.619,165.406 202.276,171.749 200.248,171.749 199.001,172.997 199.001,173.223 v2(198.934,173.29) ; v2(237.44,174.335) 237.44,174.43 237.86,174.85 237.86,174.933 240.478,177.55 244.2,177.55 244.93,178.28 244.93,178.291 245.3,178.662 XP12.3@245.3,179
  INT1 w0.2: XP6.6@181.7,181 181.7,180.919 182.8,179.819 182.8,177.706 184.649,175.857 196.22,175.857 198.636,173.441 198.675,173.441 198.826,173.29 v2(198.934,173.29) v2@198.857,173.367
  INT2, +3.3VB w0.2: XP7.11@119.8,174 120.7,173.1 120.7,169.451 121.164,168.988 122.126,168.025 159.774,168.025 165.924,174.176 166.899,175.151 167.55,175.801 167.55,181.246 165.096,183.7 154.651,183.7 152.475,181.524 152.475,178.051 153.026,177.5 156.075,177.5 156.751,178.176 156.751,178.751 XP13.3@157,179 ; v2(198.934,173.29) 198.934,173.186 199.695,172.425 201.715,172.425 204.425,175.135 204.425,184.175 206.35,186.1 230.679,186.1 234.876,181.903 238.074,178.705 238.074,175.111 237.593,174.63 237.593,174.597 237.44,174.443 v2(237.44,174.335)
  Bottom w0.25: XP13.3@157,179 156.78,178.78 156.78,178.13 156.275,177.625 154.4,177.625 154.05,177.275 154.05,176.8 154.3,176.55 178.772,176.55 179.008,176.785 179.008,176.992 178.6,177.4 176.95,177.4 176.3,178.05 176.3,181.45 177.125,182.275 180.475,182.275 181.7,181.05 XP6.6@181.7,181
CLK_ADC: DA15.4 DD1.75 | length 250
  Top w0.25: v1(68.353,36.25) 68.353,45.847 67.65,46.55 67.65,47.675 68.05,48.075 DD1.75@69.488,48.075
  Top w0.5: v1(57.425,37.125) 57.4,37.1 26.4,37.1 18.25,45.25 18.25,65.785 53.965,101.5 93.136,101.5 97.25,105.614 97.25,128.521 92.771,133 65.75,133 62.505,136.245 DA15.4@62.505,141.75
  Bottom w0.5: v1(57.425,37.125) 57.584,37.125 58.459,36.25 v1(68.353,36.25)
CLK_ADC_n: DA15.7 R40.1 XP4.15 XP5.15 XP6.12 XP7.32 | length 343.2
  Top w0.25: DA15.7@59.965,147.25 59.965,147.8 60.325,148.16 60.325,148.7 60.325,149.279 60.179,149.425 60.025,149.425 59.6,149.85 R40.1@59.6,150.25 59.6,150.65 60.025,151.075 60.179,151.075 60.325,151.221 60.325,151.783 63.952,155.411 89.201,155.411 89.259,155.469 89.455,155.469 v2(89.522,155.536) v2@89.589,155.469 ; v2(167.575,170.3) 167.67,170.3 167.832,170.137 169.135,170.137 175.7,176.703 175.7,177.989 175.7,180.662 177.213,182.175 186.875,182.175 187.33,181.72 187.33,181.709 187.7,181.338 XP6.12@187.7,181
  INT1 w0.2: v2(109.7,163.35) 109.777,163.273 109.777,163.056 109.8,163.033 109.8,154.836 108.214,153.25 97.401,153.25 95.215,155.436 89.839,155.436 89.816,155.459 89.599,155.459 v2(89.522,155.536) 88.687,155.536 87.851,154.7 87.5,154.349 87.5,152.651 103.876,136.275 156.624,136.275 169.117,148.769 169.117,169.769 168.586,170.3 v2(167.575,170.3)
  INT2, +3.3VB w0.2: XP4.15@38.9,174 38.843,174.057 38.843,175.243 39.019,175.419 40,176.4 53.4,176.4 54.8,175 54.8,172.251 44.951,162.402 44.6,162.051 44.6,156.676 47.976,153.3 90.449,153.3 90.8,153.651 90.925,153.776 90.925,154.924 90.764,155.084 90.413,155.436 89.622,155.436 v2(89.522,155.536) 89.422,155.436 81.447,155.436 79.55,157.333 79.55,159.869 78.5,160.919 XP5.15@78.5,161 ; XP7.32@99.8,172 99.8,171.683 99.3,171.183 99.3,164.5 102.65,161.15 108.75,161.15 109.8,162.2 109.8,163.033 109.777,163.056 109.777,163.273 v2(109.7,163.35)
CLK_ADC_p: DA15.6 R40.2 XP4.16 XP5.16 XP6.13 XP7.33 | length 342.1
  Top w0.25: DA15.6@61.235,147.25 61.235,147.8 60.875,148.16 60.875,148.927 60.875,149.279 61.021,149.425 61.175,149.425 61.6,149.85 R40.2@61.6,150.25 61.6,150.65 61.175,151.075 61.021,151.075 60.875,151.221 60.875,151.555 64.18,154.861 89.201,154.861 89.259,154.803 89.455,154.803 v2(89.522,154.736) v2@89.589,154.803 ; v2(167.575,169.425) 167.67,169.425 167.832,169.587 169.363,169.587 176.25,176.475 176.25,177.125 176.7,177.575 188.475,177.575 189.7,178.8 XP6.13@189.7,179
  INT1 w0.2: v2(110.5,163.35) 110.423,163.273 110.423,163.056 110.4,163.033 110.4,154.587 108.463,152.65 97.152,152.65 94.967,154.836 89.839,154.836 89.816,154.812 89.599,154.812 v2(89.522,154.736) 88.687,154.736 88.687,154.687 88.1,154.1 88.1,152.9 104.125,136.875 156.375,136.875 168.517,149.017 168.517,169.52 167.779,169.52 167.683,169.425 v2(167.575,169.425)
  INT2, +3.3VB w0.2: XP4.16@38.9,172 38.9,172.081 37.8,173.181 37.8,175.049 38.419,175.667 39.751,177 53.649,177 55.224,175.424 55.4,175.249 55.4,172.002 45.2,161.802 45.2,156.925 48.225,153.9 90.2,153.9 90.325,154.025 90.325,154.675 90.164,154.836 89.622,154.836 v2(89.522,154.736) 89.422,154.836 81.199,154.836 78.95,157.084 78.95,158.233 78.5,158.683 XP5.16@78.5,159 ; XP7.33@97.8,174 98.7,173.1 98.7,164.251 102.401,160.55 108.999,160.55 110.4,161.951 110.4,163.033 110.423,163.056 110.423,163.273 v2(110.5,163.35)
CLK_DDAC: DA11.4 XP3.18 | length 136.8
  Top w0.5: XP3.18@137.09,71.318 130.868,71.318 126.7,67.15 126.7,62.325 131.6,57.425 131.6,52 135.883,47.717 151.417,47.717 158.95,55.25 158.95,106 150.38,114.57 DA11.4@150.38,126.975
CLK_DDAC_n: DA11.7 R32.1 XP7.4 XP10.5 | length 167.6
  Top w0.25: DA11.7@147.84,132.475 147.84,133.025 148.2,133.385 148.2,133.925 148.2,134.504 148.054,134.65 147.9,134.65 147.475,135.075 R32.1@147.475,135.475 147.475,135.875 147.9,136.3 148.054,136.3 148.2,136.446 148.2,137.804 148.142,137.862 148.142,138.058 v2(148.075,138.125)
  INT1 w0.2: v2(131.375,178.7) 136.225,173.85 148.175,161.9 148.175,138.442 148.152,138.419 148.152,138.202 v2(148.075,138.125)
  INT2, +3.3VB w0.2: v2(148.075,138.125) 148.152,138.048 148.152,137.831 148.175,137.808 148.175,134.05 148.351,133.874 148.576,133.649 148.799,133.426 149.15,133.075 189.324,133.075 189.675,133.426 209.199,152.95 209.55,153.301 209.55,173.05 214.4,177.9 214.4,178.9 XP10.5@214.5,179
  Bottom w0.25: XP7.4@127.8,172 129,170.8 130.3,170.8 131.15,171.65 131.15,178.38 131.375,178.605 v2(131.375,178.7)
CLK_DDAC_p: DA11.6 R32.2 XP7.5 XP10.6 | length 167.4
  Top w0.25: v2(148.875,138.125) 148.808,138.058 148.808,137.862 148.75,137.804 148.75,136.446 148.896,136.3 149.05,136.3 149.475,135.875 R32.2@149.475,135.475 149.475,135.075 149.05,134.65 148.896,134.65 148.75,134.504 148.75,134.152 148.75,133.385 149.11,133.025 DA11.6@149.11,132.475
  INT1 w0.2: v2(131.375,179.5) 131.424,179.5 136.474,174.45 148.775,162.149 148.775,138.442 148.798,138.419 148.798,138.202 v2(148.875,138.125)
  INT2, +3.3VB w0.2: v2(148.875,138.125) 148.798,138.048 148.798,137.831 148.775,137.808 148.775,134.299 149.399,133.675 189.075,133.675 208.95,153.55 208.95,173.299 213.4,177.749 213.4,179.819 214.5,180.919 XP10.6@214.5,181
  Bottom w0.25: XP7.5@125.8,174 127.1,175.3 130.454,175.3 130.6,175.446 130.6,178.809 131.291,179.5 v2(131.375,179.5)
CLK_RG: DD1.69 DD4.92 | length 149.9
  Top w0.25: 65.75,41.549 DD1.69@65.75,44.837 ; 65.75,41.6 65.75,9 68.1,6.65 126.9,6.65 138.4,18.15 138.4,34.896 130.146,43.15 DD4.92@122.9,43.15
CNT_VD: DD4.12 R61.2 VT1.G | length 70.7
  Top w0.25: v1(89.65,45.3) 89.771,45.3 90.271,44.8 97.125,44.8 97.975,45.65 DD4.12@100.924,45.65
  Top w0.5: R61.2@42.05,32.475 v1(44.319,32.475) 44.325,32.469 44.325,26.525 VT1.G@44.3,26.5
  Bottom w0.5: v1(44.319,32.475) 67.54,32.475 75.815,40.75 85.1,40.75 v1(89.65,45.3)
CONF_DO: DD1.92 R9.1 | length 3.6
  Top w0.25: DD1.92@69.488,56.575 72.875,56.575 R9.1@73.05,56.575
D1_n: DD4.103 DD5.3 | length 197.5
  Top w0.25: DD5.3@21.55,32.325 21.45,32.425 20.865,32.425 20.59,32.7 20.383,32.7 16.15,28.467 16.15,14.803 26.403,4.55 127.65,4.55 140.45,17.35 140.45,38.175 130,48.625 123.615,48.625 122.925,48.625 DD4.103@122.9,48.65
D1_p: DD4.104 DD5.1 | length 201.2
  Top w0.25: DD5.1@21.55,33.625 21.489,33.564 20.905,33.564 20.59,33.25 20.155,33.25 15.6,28.695 15.6,14.575 26.175,4 127.878,4 141,17.122 141,38.403 130.228,49.175 123.387,49.175 123.362,49.15 DD4.104@122.9,49.15
D1A_n: DD5.4 XP8.3 | length 9.6
  Top w0.25: DD5.4@23.85,32.325 v2(25.025,32.325)
  INT1 w0.2: v2(25.025,32.325) 25.375,32.675 26.2,32.675 26.89,31.985 26.89,26.991 26.773,26.873 26.699,26.873 26.326,26.5 XP8.3@25.92,26.5
D1A_p: DD5.6 XP8.4 | length 10.6
  Top w0.25: DD5.6@23.85,33.625 v2(25.025,33.625)
  INT1 w0.2: v2(25.025,33.625) 25.375,33.275 26.449,33.275 27.49,32.234 27.49,26.991 27.607,26.873 27.681,26.873 28.054,26.5 XP8.4@28.46,26.5
DAT1_DAC: DA5.4 DD4.77 | length 33.3
  Top w0.25: DD4.77@122.9,35.65 127.05,35.65 129.457,33.243 v1(129.457,32.332)
  Bottom w0.5: v1(129.457,32.332) 147.157,32.332 148.375,33.55 DA5.4@148.375,38.992
DAT1_DAC_n: DA5.7 R16.2 XP4.2 XP5.2 | length 429
  INT1 w0.2: XP4.2@52.9,172 54.101,172 54.4,171.701 54.4,170.15 48.853,164.603 48.501,164.251 48.501,162.327 49.699,161.13 50.57,161.13 51.4,160.3 51.4,153.9 33.1,135.6 9.75,135.6 9.325,135.175 4.65,130.5 4.65,26.299 4.65,26.05 5.001,25.699 21.55,9.15 131.65,9.15 150.505,28.005 150.505,51.183 150.528,51.206 150.528,51.423 v2(150.605,51.5)
  INT2, +3.3VB w0.2: v2(50.4,161.13) 50.508,161.13 50.677,161.299 52.105,161.299 52.457,161.65 55.607,164.8 91.251,164.8 94.8,161.251 94.8,159.183 94.115,158.498 93.267,158.498 92.765,159 XP5.2@92.5,159
  Bottom w0.25: v2@150.605,51.584 v2(150.605,51.5) 150.538,51.433 150.538,50.838 150.48,50.78 150.48,48.813 150.626,48.667 150.78,48.667 151.205,48.242 R16.2@151.205,47.842 151.205,47.442 150.47,46.707 150.47,45.463 150.616,45.317 150.64,45.317 150.915,45.042 DA5.7@150.915,44.492
DAT1_DAC_p: DA5.6 R16.1 XP4.3 XP5.3 | length 436.6
  INT1 w0.2: XP4.3@50.9,174 51.75,173.15 53.8,173.15 55,171.95 55,169.901 49.101,164.003 49.101,162.576 49.781,161.896 50.304,161.896 50.502,162.093 v2(50.61,162.093) 50.61,161.939 50.827,161.722 52,160.549 52,153.651 51.824,153.476 33.524,135.176 33.349,135 9.999,135 5.25,130.251 5.25,26.299 21.799,9.75 131.401,9.75 149.905,28.254 149.905,51.183 149.882,51.206 149.882,51.423 v2(149.805,51.5)
  INT2, +3.3VB w0.2: v2(50.61,162.093) 50.718,162.093 50.913,161.899 51.857,161.899 55.358,165.4 91.5,165.4 95.4,161.5 95.4,158.934 94.364,157.898 91.866,157.898 91.4,158.364 91.4,160.1 XP5.3@90.5,161
  Bottom w0.25: DA5.6@149.645,44.492 149.92,44.767 149.92,46.727 149.205,47.442 R16.1@149.205,47.842 149.205,48.242 149.63,48.667 149.784,48.667 149.93,48.813 149.93,50.78 149.872,50.838 149.872,51.433 v2(149.805,51.5) v2@149.93,51.5
DAT2_DAC: DA6.4 DD4.76 | length 58.1
  Top w0.25: DD4.76@122.9,35.15 126.15,35.15 127.9,33.4 v1(127.9,30.9)
  Bottom w0.5: v1(127.9,30.9) 168.565,30.9 171.165,33.5 DA6.4@171.165,38.992
DAT2_DAC_n: DA6.7 R18.2 XP6.2 XP7.7 XP12.5 XP13.5 | length 383.1
  INT1 w0.2: XP13.5@159,179 159,179.151 157.9,180.251 157.9,182.181 158.819,183.1 163.999,183.1 164.174,182.924 164.3,182.799 168.841,178.257 175.731,178.257 176,178.526 176,179.75 177.001,180.751 177.451,180.751 XP6.2@177.7,181 ; v2(173.5,50.5) 173.423,50.577 173.423,50.794 173.4,50.817 173.4,51.1 177.3,55 253,55 262.749,64.749 263.1,65.1 263.1,172.774 259.87,176.003 247.4,176.003 246.8,176.603 246.8,178.033 247.051,178.284 247.051,178.751 XP12.5@247.3,179
  INT2, +3.3VB w0.2: XP7.7@123.8,174 123.8,174.267 124.3,174.767 124.3,175.5 125.1,176.3 158.156,176.3 158.824,176.968 159,177.144 XP13.5@159,179 ; XP6.2@177.7,181 177.451,180.751 176.968,180.751 176.25,180.033 176.25,178.374 176.133,178.257 175.967,178.257 175.5,178.724 175.5,180.285 182.515,187.3 231.176,187.3 236.076,182.4 236.276,182.2 245.843,182.2 246.25,181.793 246.25,180.05 246.4,179.9 XP12.5@247.3,179
  Bottom w0.25: v2(173.5,50.5) 173.433,50.433 173.433,50.237 173.375,50.179 173.375,48.813 173.521,48.667 173.675,48.667 174.1,48.242 R18.2@174.1,47.842 174.1,47.442 173.345,46.687 173.345,45.402 173.705,45.042 DA6.7@173.705,44.492
DAT2_DAC_p: DA6.6 R18.1 XP6.3 XP7.8 XP12.6 XP13.6 | length 390
  INT1 w0.2: XP13.6@159,181 159,181.317 158.55,181.767 158.55,181.983 159.067,182.5 163.75,182.5 168.593,177.657 178.69,177.657 179.7,178.667 XP6.3@179.7,179 ; v2(172.7,50.5) 172.777,50.577 172.777,50.794 172.8,50.817 172.8,51.349 177.051,55.6 252.751,55.6 262.5,65.349 262.5,172.525 259.622,175.403 247.151,175.403 246.2,176.355 246.2,179.819 247.3,180.919 XP12.6@247.3,181
  INT2, +3.3VB w0.2: XP7.8@123.8,172 124.9,173.1 124.9,175.251 125.349,175.7 158.405,175.7 159.424,176.719 159.6,176.895 160.075,177.37 160.075,179.596 159,180.671 XP13.6@159,181 ; XP6.3@179.7,179 179.7,177.75 179.2,177.25 176.126,177.25 174.9,178.476 174.9,180.533 182.267,187.9 231.424,187.9 236.524,182.8 246.091,182.8 246.85,182.041 246.85,181.767 247.3,181.317 XP12.6@247.3,181
  Bottom w0.25: DA6.6@172.435,44.492 172.435,45.042 172.795,45.402 172.795,46.747 172.1,47.442 R18.1@172.1,47.842 172.1,48.242 172.525,48.667 172.679,48.667 172.825,48.813 172.825,50.179 172.767,50.237 172.767,50.433 v2(172.7,50.5)
DAT_ADC1: DA10.1 DD1.58 | length 214.4
  Top w0.25: 60.25,38.65 DD1.58@60.25,44.837
  Top w0.5: DA10.1@38.595,148.85 38.595,147.13 53,132.725 53,114.8 51,112.8 51,100.5 16.5,66 16.5,44.775 25.075,36.2 42.525,36.2 62.475,16.25 63.275,16.25 64.3,17.275 64.3,23.275 60.25,27.325 60.25,38.65
DAT_ADC1_n: DA10.7 R25.2 R26.1 XP4.18 | length 62.6
  Top w0.25: DA10.7@39.865,154.35 40.025,154.51 40.025,155.56 40.175,155.71 40.175,157.379 40.029,157.525 39.875,157.525 39.45,157.95 R26.1@39.45,158.35 39.45,158.75 40.125,159.425 40.125,159.925 40.125,160.725 39.4,161.45 R25.2@39.4,161.75 39.4,162.05 40.125,162.775 40.125,163.403 45.057,168.335 54.792,168.335 58.625,172.168 58.625,174.929 58.567,174.987 58.567,175.183 v2(58.5,175.25)
  INT1 w0.2: XP4.18@36.9,172 36,172.9 36,173.812 36,175.151 36.749,175.9 58.25,175.9 58.6,175.55 58.6,175.35 v2(58.5,175.25)
DAT_ADC1_p: DA10.6 R26.2 R27.1 XP4.19 | length 62.6
  Top w0.25: 40.675,160.153 40.675,160.725 41.4,161.45 R27.1@41.4,161.75 41.4,162.05 40.675,162.775 40.675,163.175 45.285,167.785 55.02,167.785 59.175,171.94 59.175,174.929 59.233,174.987 59.233,175.183 v2(59.3,175.25) ; 40.675,160.153 40.675,159.525 41.45,158.75 R26.2@41.45,158.35 41.45,157.95 41.025,157.525 40.871,157.525 40.725,157.379 40.725,155.938 40.725,155.675 40.902,155.498 40.902,154.583 DA10.6@41.135,154.35
  INT1 w0.2: XP4.19@34.9,174 34.9,174.267 35.4,174.767 35.4,175.4 36.5,176.5 58.499,176.5 59.2,175.799 59.2,175.35 v2(59.3,175.25)
  INT2, +3.3VB w0.2: v2@59.234,175.184 v2(59.3,175.25)
DAT_ADC2: DA13.1 DD1.60 | length 130.6
  Top w0.25: DD1.60@61.25,44.837 61.25,40.85 64.475,37.625 v1(64.7,37.625)
  Top w0.5: v1(105.645,133.75) DA13.1@105.645,138.597
  Bottom w0.5: v1(64.7,37.625) 71.225,37.625 84.418,50.818 84.418,62.243 97.85,75.675 97.85,104.025 105.7,111.875 105.7,122.643 105.645,122.698 v1(105.645,133.75)
DAT_ADC2_n: DA13.7 R30.2 R31.1 XP5.18 | length 49.5
  Top w0.25: R30.2@106.4,151.445 106.4,151.845 107.15,152.595 107.15,153.385 107.15,156.979 107.092,157.037 107.092,157.233 v2(107.025,157.3) ; R30.2@106.45,151.198 106.45,150.995 106.825,150.62 107.004,150.62 107.15,150.474 107.15,149.548 107.15,149.148 106.5,148.497 R31.1@106.5,148.097 106.5,147.697 106.925,147.272 107.079,147.272 107.225,147.126 107.225,145.457 107.075,145.307 107.075,144.257 DA13.7@106.915,144.097
  INT1 w0.2: XP5.18@76.5,159 76.5,158.683 76.05,158.233 76.05,158.053 76.717,157.386 101.814,157.386 104,155.2 106.3,155.2 107.125,156.025 107.125,157.2 v2(107.025,157.3)
DAT_ADC2_p: DA13.6 R31.2 R34.1 XP5.19 | length 54
  Top w0.25: v2(107.825,157.3) 107.758,157.233 107.758,157.037 107.7,156.979 107.7,153.158 107.7,152.548 108.45,151.797 R34.1@108.45,151.497 108.45,151.198 107.7,150.447 107.7,149.775 107.7,149.297 108.5,148.497 R31.2@108.5,148.097 108.5,147.697 108.075,147.272 107.921,147.272 107.775,147.126 107.775,145.685 107.775,145.422 107.952,145.245 107.952,144.33 DA13.6@108.185,144.097
  INT1 w0.2: XP5.19@74.5,161 75.45,160.05 75.45,157.804 76.469,156.786 101.566,156.786 103.751,154.6 106.549,154.6 107.725,155.776 107.725,157.2 v2(107.825,157.3)
DAT_ADC3: DA16.1 DD1.110 | length 204
  Top w0.25: DD1.110@66.75,66.813 66.75,68.975 73.525,75.75 75.459,75.75
  Top w0.5: 75.459,75.75 85.05,75.75 95.775,86.475 v1(123.225,86.475) ; DA16.1@190.27,151.4 190.273,151.398 190.273,148.727 v1(190.275,148.725)
  Bottom w0.5: v1(123.225,86.475) 123.225,99.55 137.5,113.825 197.475,113.825 202.675,119.025 202.675,136.325 v1(190.275,148.725)
DAT_ADC3_n: DA16.7 R37.2 R38.1 XP6.15 | length 33.2
  Top w0.25: DA16.7@191.54,156.9 191.7,157.06 191.7,158.11 191.85,158.26 191.85,159.929 191.704,160.075 191.55,160.075 191.125,160.5 R38.1@191.125,160.9 191.125,161.3 191.8,161.975 191.8,162.475 191.8,163.275 191.075,164 R37.2@191.075,164.3 191.075,164.6 191.8,165.325 191.8,167.225 191.8,174.425 191.8,176.063 192.912,177.175 196.908,177.175 197.054,177.321 197.054,178.054 196.908,178.201 196.701,178.201 196.25,177.75 192.95,177.75 XP6.15@191.7,179
DAT_ADC3_p: DA16.6 R38.2 R41.1 XP6.16 | length 36.9
  Top w0.25: XP6.16@191.7,181 191.7,181.175 192.6,182.075 196.325,182.075 196.975,181.425 196.975,178.975 197.604,178.346 197.604,177.094 197.136,176.625 193.14,176.625 192.35,175.835 192.35,174.653 192.35,167.453 192.35,165.325 193.075,164.6 R41.1@193.075,164.3 193.075,164 192.35,163.275 192.35,162.703 192.35,162.075 193.125,161.3 R38.2@193.125,160.9 193.125,160.5 192.7,160.075 192.546,160.075 192.4,159.929 192.4,158.488 192.4,158.225 192.577,158.048 192.577,157.133 DA16.6@192.81,156.9
DAT_ADC4: DA18.1 DD1.111 | length 156.9
  Top w0.25: DD1.111@66.25,66.813 66.25,69.425 73.65,76.825 75.419,76.825
  Top w0.5: 75.419,76.825 84.675,76.825 95.975,88.125 v1(119.45,88.125) ; v1(151.25,145.15) 151.272,145.173 151.272,147.427 DA18.1@151.295,147.45
  Bottom w0.5: v1(119.45,88.125) 119.45,99.425 136.15,116.125 156.7,116.125 161.65,121.075 161.65,134.65 v1@151.029,145.271
DAT_ADC4_n: DA18.7 R43.2 R44.1 XP7.29 | length 95.6
  Top w0.25: XP7.29@101.8,174 100.55,175.25 91.079,175.25 90.579,174.75 90.579,173.421 90.432,173.275 89.736,173.275 89.267,172.806 89.267,170.41 92.42,167.257 149.018,167.257 152.825,163.45 152.825,161.988 152.825,161.375 152.1,160.65 R43.2@152.1,160.35 152.1,160.05 152.825,159.325 152.825,158.525 152.825,158.025 152.15,157.35 R44.1@152.15,156.95 152.15,156.55 152.575,156.125 152.729,156.125 152.875,155.979 152.875,154.31 152.725,154.16 152.725,153.11 DA18.7@152.565,152.95
DAT_ADC4_p: DA18.6 R44.2 R48.1 XP7.30 | length 94.6
  Top w0.25: XP7.30@101.8,172 100.469,170.669 91.535,170.669 90.579,171.625 90.579,172.579 90.432,172.725 89.963,172.725 89.817,172.579 89.817,170.638 92.648,167.807 149.246,167.807 153.375,163.678 153.375,163.45 153.375,162.215 153.375,161.375 154.1,160.65 R48.1@154.1,160.35 154.1,160.05 153.375,159.325 153.375,158.753 153.375,158.125 154.15,157.35 R44.2@154.15,156.95 154.15,156.55 153.725,156.125 153.571,156.125 153.425,155.979 153.425,154.538 153.425,154.275 153.602,154.098 153.602,153.183 DA18.6@153.835,152.95